# Altium PCB Control.PcbDoc
Units mm, origin at the board's own origin, x right, y up, seen from the top; angles counter-clockwise.
Board outline 90.91 x 58.67 mm, 2 copper layers (Top Layer, Bottom Layer); 26 components, 31 nets, 106 pads, 38 vias.
Unrouted connection lines stored in the file: 1.
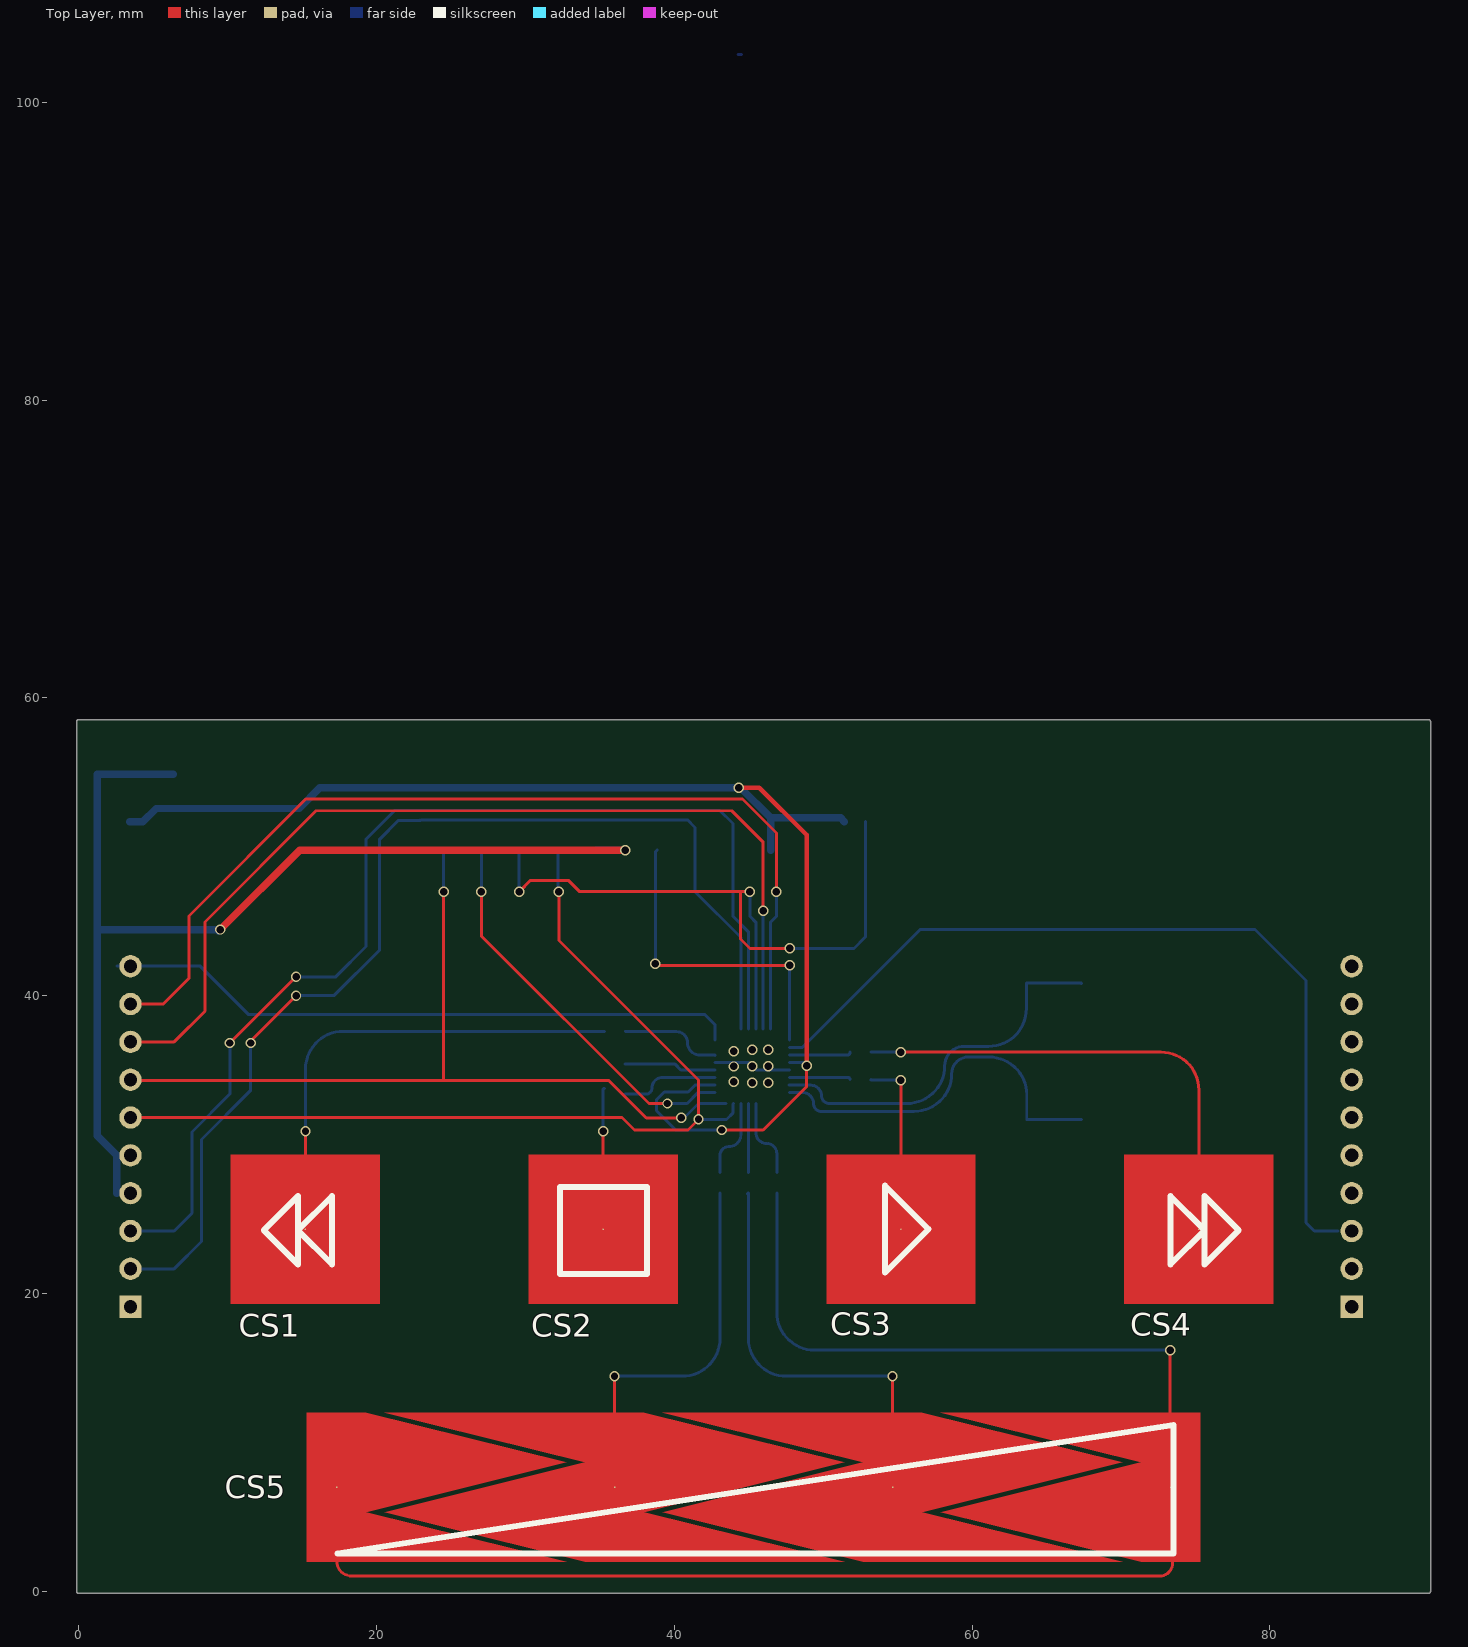
[diagram p0: Top Layer view]
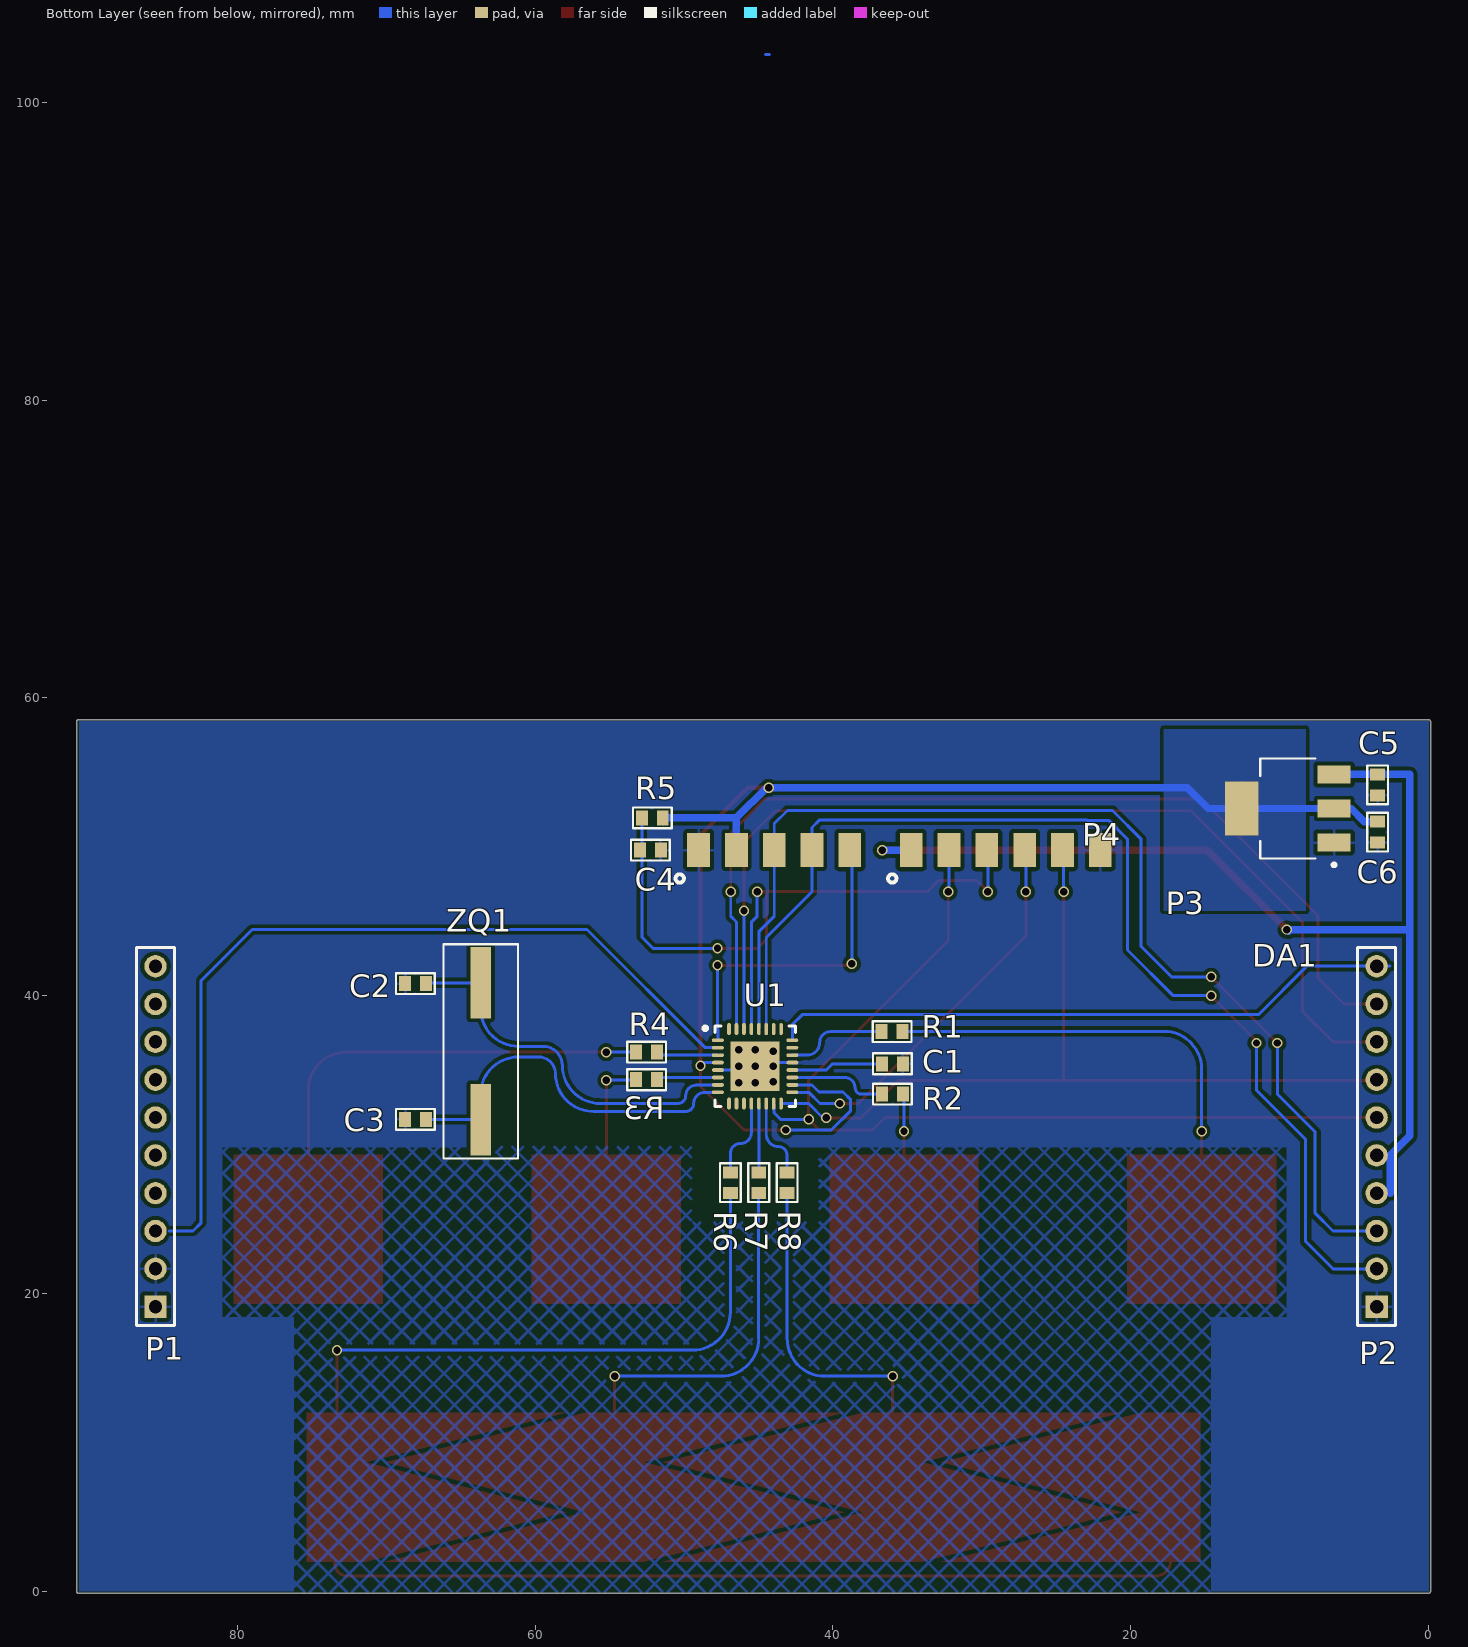
[diagram p1: Bottom Layer view, seen from below]
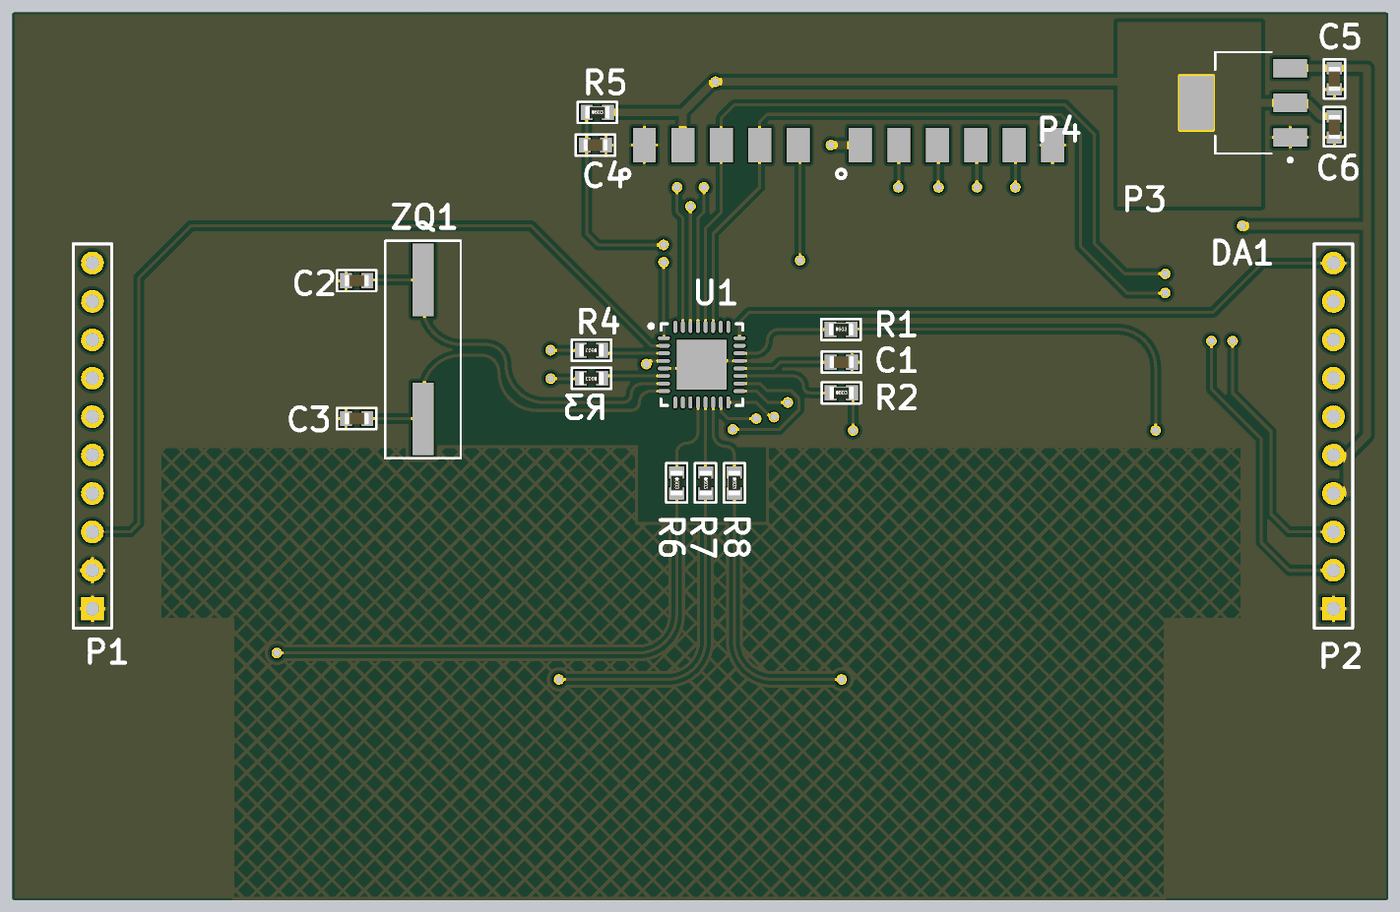
[diagram p2: 3D render of the assembled board from below, using the file's embedded part models]

## Layer stack, top to bottom
Top Solder: solder mask 0.0102, Solder Resist, Dk 3.5
Top Layer: signal copper 0.0356
Dielectric 1: dielectric 0.32, FR-4, Dk 4.8
Bottom Layer: signal copper 0.0356
Bottom Solder: solder mask 0.0102, Solder Resist, Dk 3.5

## Board outline
-0.127,0 ccw(c0,0) 0,-0.127 90.66,-0.127 ccw(c90.66,0) 90.787,0 90.787,58.42 ccw(c90.66,58.42) 90.644,58.546 ccw(c90.627,58.42) 90.627,58.547 0,58.547 ccw(c0,58.42) -0.127,58.42

## Design rules (kind name [scope] priority, off if disabled: settings)
Clearance Vcc [InNamedPolygon('Vcc')] p1: gap=0.254 ignorepadtopadclearanceinfootprint=FALSE except(0: Arc-Hole Track-Hole SMDPad-Fill SMDPad-Poly SMDPad-Region SMDPad-Hole THPad-Hole Via-Hole Fill-Hole Poly-Hole Region-Hole Text-Hole)
Clearance [All] p2: gap=0.254 ignorepadtopadclearanceinfootprint=TRUE except(0: Arc-Hole Track-Hole SMDPad-Hole THPad-Hole Via-Hole Fill-Hole Poly-Hole Region-Hole Text-Hole)
PlaneClearance [All] p1: clearance=0.3
PolygonConnect PolygonConnect_1 [All vs IsNamedPolygon('Vcc')] p1: thpad.connectstyle=Relief thpad.reliefconductorwidth=0.254 thpad.reliefentries=4 thpad.polygonreliefangle="90 Angle" thpad.airgapwidth=0.254 smdpad.connectstyle=Relief smdpad.reliefconductorwidth=0.254 smdpad.reliefentries=4 smdpad.polygonreliefangle="90 Angle" smdpad.airgapwidth=0 via.connectstyle=Relief via.reliefconductorwidth=0.254 via.reliefentries=4 via.polygonreliefangle="90 Angle" via.airgapwidth=0.254
PolygonConnect [All] p2: connectstyle=Relief reliefconductorwidth=0.2 reliefentries=4 polygonreliefangle="90 Angle" airgapwidth=0.254
RoomDefinition Control [InComponentClass('Control')] p1: confinementstyle=ConfineOut formatcopy=TRUE lockcomponents=FALSE outline 0.076,-13.005 16.332,-13.005 16.332,-3.937 0.076,-3.937
RoutingVias [All] p1: holewidth=0.711 width=1.27 viastyle="Through Hole" minholewidth=0.5 minwidth=0.7 maxholewidth=0.7 maxwidth=0.9
SolderMaskExpansion [All] p1: expansion=0.102
Width [All] p1: maxlimit=0.5 minlimit=0.2 preferedwidth=0.3
29 further rules are at their usual default settings.

## Components (designator, comment, footprint, x,y, rotation, side; value= is the part's Value field where it differs from the comment)
C1 "100nF" SM/C_0603 36.706,35.433 r180 bottom
C2 "22pnF" SM/C_0603 68.735,40.818 r180 bottom
C3 "22pF" SM/C_0603 68.735,31.699 r180 bottom
C4 "100nF" SM/C_0603 52.959,49.784 r180 bottom
C5 "100nF" SM/C_0603 3.429,54.864 r270 bottom
C6 "100nF" SM/C_0603 3.429,51.692 r270 bottom
CS1 "Prev Button" ?#1 15.229,24.314 r0 top
CS2 "Stop Button" ?#1 35.229,24.314 r0 top
CS3 "Play Button" ?#1 55.229,24.314 r0 top
CS4 "Next Button" ?#1 75.229,24.314 r0 top
CS5 "Volume Slider" ?#2 45.333,7 r180 top
DA1 "IRU1117-3.3" SOT223 6.35,50.292 r90 bottom
P1 "Header 10" HDR1X10 85.491,19.126 r90 bottom
P2 "Header 10" HDR1X10 3.491,19.126 r90 bottom
P3 "Header 6H" "Header 6 SMD" 34.747,49.784 r180 bottom
P4 "Header 5H" "Header 5 SMD" 49.022,49.784 r180 bottom
R1 "0" SM/R_0603 36.728,37.592 r180 bottom
R2 "0" SM/R_0603 36.703,33.401 r180 bottom
R3 "0" SM/R_0603 51.816,34.366 r0 bottom
R4 "0" SM/R_0603 51.816,36.22 r0 bottom
R5 "10k" SM/R_0603 52.832,51.943 r180 bottom
R6 "0" SM/R_0603 46.888,28.146 r270 bottom
R7 "0" SM/R_0603 44.983,28.146 r270 bottom
R8 "0" SM/R_0603 43.078,28.146 r270 bottom
U1 "ATmega328PB-MN" 32M1-A_N 45.229,35.266 r180 bottom locked
ZQ1 "HC-49SM" HC-49SM 63.652,31.677 r90 bottom

## Footprints (in the part's own frame and the unit in brackets; to place one, negate y for a bottom-side part, rotate by r counter-clockwise, add the part's x,y. Pads: shape width x height; smd on the part's side, far side on the other; paste and mask are expansions set on the pad)
32M1-A_N [mm] "QFN, 32-Leads, Body 5x5mm, Pitch 0.5mm, Thermal Pad 3.3x3.3mm, IPC Medium Density"
  oval 0.8x0.25 smd: 1(-2.5,1.75) 2(-2.5,1.25) 3(-2.5,0.75) 4(-2.5,0.25) 5(-2.5,-0.25) 6(-2.5,-0.75) 7(-2.5,-1.25) 8(-2.5,-1.75) 17(2.5,-1.75) 18(2.5,-1.25) 19(2.5,-0.75) 20(2.5,-0.25) 21(2.5,0.25) 22(2.5,0.75) 23(2.5,1.25) 24(2.5,1.75)
  oval 0.25x0.8 smd: 9(-1.75,-2.5) 10(-1.25,-2.5) 11(-0.75,-2.5) 12(-0.25,-2.5) 13(0.25,-2.5) 14(0.75,-2.5) 15(1.25,-2.5) 16(1.75,-2.5) 25(1.75,2.5) 26(1.25,2.5) 27(0.75,2.5) 28(0.25,2.5) 29(-0.25,2.5) 30(-0.75,2.5) 31(-1.25,2.5) 32(-1.75,2.5)
  rect 3.3x3.3 smd: 33(0,0)
  silkscreen extent -3.48,-2.7 2.7,2.7, body extent -2.55,-2.55 2.55,2.55, height 1
HC-49SM [mm]
  rect 4.8x1.4 smd: 1(0,0) 2(9.191,0)
  silkscreen extent -2.6,-2.5 11.79,2.5
HDR1X10 [mm] "Connector; Header; 10 Position"
  rect 1.5x1.5 hole 0.9: 1(0,0)
  round 1.5 hole 0.9: 2(2.54,0) 3(5.08,0) 4(7.62,0) 5(10.16,0) 6(12.7,0) 7(15.24,0) 8(17.78,0) 9(20.32,0) 10(22.86,0)
  silkscreen extent -1.27,-1.27 24.13,1.27
"Header 5 SMD" [mm]
  rect 1.524x2.29 smd: 1(0,0) 2(2.54,0) 3(5.08,0) 4(7.62,0) 5(10.16,0)
  silkscreen extent -1.55,-2.19 -0.99,-1.62
"Header 6 SMD" [mm]
  rect 1.524x2.29 smd: 1(0,0) 2(2.54,0) 3(5.08,0) 4(7.62,0) 5(10.16,0) 6(12.7,0)
  silkscreen extent -1.55,-2.19 -0.99,-1.62
SM/C_0603 [mm]
  rect 0.8x1 smd: 1(0,0) 2(1.4,0)
  silkscreen extent -0.6,-0.7 2,0.7, body extent -0.09,-0.4 1.51,0.4, height 0.6
SM/R_0603 [mm]
  rect 0.8x1 smd: 1(0,0) 2(1.4,0)
  silkscreen extent -0.6,-0.7 2,0.7, body extent -0.09,-0.41 1.51,0.41, height 0.45
SOT223 [mil]
  rect 48x88 smd: 1(0,0) 2(90,0) 3(180,0)
  rect 142x88 smd: 4(90,244)
  silkscreen extent -63,-4 222,195
?#1 [mm]
  round 0.1 smd paste-0.05: 1(0,0)
  Top Layer region: -5,-5 -5,5 5,5 5,-5 -5,-5
?#2 [mm]
  round 0.1 smd paste-0.05: 1(-28,0) 1(28,0) 2(-9.333,0) 3(9.333,0)
  Top Layer region: -30,5 -26,5 -12.578,1.667 -26,-1.667 -12.578,-5 -30,-5 -30,5
  Top Layer region: -24.755,5 -7.333,5 6.089,1.667 -7.333,-1.667 6.089,-5 -11.333,-5 -24.755,-1.667 -11.333,1.667 -24.755,5 -24.755,5
  Top Layer region: -6.089,5 11.333,5 24.755,1.667 11.333,-1.667 24.755,-5 7.333,-5 -6.089,-1.667 7.333,1.667 -6.089,5 -6.089,5
  Top Layer region: 12.578,5 30,5 30,-5 26,-5 12.578,-1.667 26,1.667 12.578,5 12.578,5

## Part data
C1 C2 C3 C4 C5 C6: library part C_0603, Manufacturer=AVX, Package=0603, Tolerance=±20%, Voltage=50V, TCC=±15%, Type=X7R
CS1 CS2 CS3 CS4: library part QTouchButton, "QTouch Button", ConfigurationParameters==__sensorid[1]=width[15]=height[15]=, ConfiguratorName=ATMEL_TOUCH
CS5: library part MediumQTouchSlider, "Medium QTouch Slider", ConfigurationParameters==__sensorid[4]=width[50]=height[12]=gapthickness[0.3]=, ConfiguratorName=ATMEL_TOUCH
DA1: library part IRU1117, Package=SOT-223, Òèï=IRU1117-18CY
P1 P2: "Header, 10-Pin", LatestRevisionDate=17-Jul-2002, LatestRevisionNote="Re-released for DXP Platform.", Publisher="Altium Limited"
P3 P4: "Header, 5-Pin, Right Angle", LatestRevisionDate=17-Jul-2002, LatestRevisionNote="Re-released for DXP Platform.", Publisher="Altium Limited"
R1 R2 R3 R4 R5 R6 R7 R8: library part R_0603, Manufacturer=YAGEO, Package=0603, Power=1/10W, Tolerance=±5%, TCR=±100ppm/°C, Type=RC
U1: library part ATmega328P-MN, "8-bit AVR Microcontroller, 32KB Flash, 1KB EEPROM, 2KB SRAM, 32-pin MLF, Industrial Grade (-40°C to 105°C)", Code_JEDEC=MO-220-VHHD-2, ComponentLink1Description="Manufacturer URL", ComponentLink1URL=http://www.atmel.com/, ComponentLink2Description="ATmega48A/48PA/88A/88PA/168A/168PA/328/328P Datasheet", ComponentLink2URL=http://www.atmel.com/dyn/resources/prod_documents/8271.pdf, ComponentLink3Description="ATmega48A/48PA/88A/88PA/168A/168PA/328/328P Summary", ComponentLink3URL=http://www.atmel.com/dyn/resources/prod_documents/8271S.pdf, DatasheetVersion="revD, May-2011", PackageDescription="32-Pin Micro Lead Frame Package (MLF),  5 x 5 x 1.0 mm Body, Pitch 0.50 mm, 3.10mm Exposed Pad", PackageReference=32M1-A, PackageVersion="revE, May-2006"
ZQ1: Ïðèì=Hosonic, Òèï=HC-49SM-11.0592

## Via types
v1: diameter 0.7, hole 0.5, Top Layer to Bottom Layer, 38 vias

## Nets (pads, with @x,y where several pads share a name; then routed paths per layer and width w, separated by ;. In a path a pad name is that pad's centre, name@x,y a point inside that pad or via, vN(x,y) a via of type N, cw(c..) or ccw(c..) an arc to the next point about the centre after c; other vN are vias at no path point)
GND: C1.2 C2.1 C3.1 C4.2 C5.2 C6.2 DA1.1 P1.1 P1.2 P2.1 P3.6 P4.1 U1.5 U1.21 U1.33 | length 5.2
  Bottom Layer w0.2: U1.21 44.979,35.516 v1(45.229,35.266) 45.479,35.016 U1.5
  other v1: 45.229,34.166 46.329,34.166 43.999,34.238 43.999,35.254 46.329,35.266 43.999,36.27 45.229,36.366 46.329,36.366
I2C_CLK: P2.3 P4.3 U1.28 | length 76.2
  Top Layer w0.2: v1(10.16,36.83) v1(14.605,41.275)
  Bottom Layer w0.2: P2.3 6.426,24.206 7.62,25.4 7.62,30.861 10.16,33.401 v1(10.16,36.83) ; v1(14.605,41.275) 17.272,41.275 19.304,43.307 19.304,50.521 21.234,52.451 43.053,52.451 43.942,51.562 P4.3 43.942,45.339 44.979,44.302 U1.28
I2C_SDA: P2.2 P4.4 U1.27 | length 75.7
  Top Layer w0.2: v1(11.557,36.83) 11.557,36.957 v1(14.605,40.005)
  Bottom Layer w0.2: P2.2 6.426,21.666 8.255,23.495 8.255,30.353 11.557,33.655 v1(11.557,36.83) ; v1(14.605,40.005) 17.145,40.005 20.218,43.078 20.218,50.521 21.483,51.785 22.956,51.785 22.987,51.816 40.894,51.816 41.402,51.308 P4.4 41.402,46.99 44.479,43.913 U1.27
NetC1_1: C1.1 U1.20 | length 6.2
  Bottom Layer w0.2: C1.1 40.03,35.433 40.447,35.016 U1.20
NetCS1_1: CS1.1 R1.2 | length 32.4
  Top Layer w0.2: 15.138,21.356 ccw(c15.229,21.356) 15.229,21.266 ; CS1.1 15.24,24.314 v1(15.24,30.912)
  Bottom Layer w0.2: v1(15.24,30.912) 15.24,35.077 cw(c17.78,35.077) 17.78,37.617 R1.2@35.306,37.617
NetCS2_1: CS2.1 R2.2 | length 9.6
  Top Layer w0.2: 35.229,21.266 35.255,21.293 ; CS2.1@35.23,24.314 v1(35.23,30.912)
  Bottom Layer w0.2: v1(35.23,30.912) 35.23,33.706 cw(c35.306,33.706) R2.2@35.306,33.782
NetCS3_1: CS3.1 R3.2 | length 12.1
  Top Layer w0.2: 55.194,21.301 55.229,21.266 ; v1(55.22,34.341) 55.22,24.314 CS3.1
  Bottom Layer w0.2: R3.2 ccw(c53.241,34.366) 53.241,34.341 v1(55.22,34.341) ccw(c55.194,34.341) v1@55.194,34.366
NetCS4_1: CS4.1 R4.2 | length 32.9
  Top Layer w0.2: v1(55.22,36.22) 72.689,36.22 cw(c72.689,33.68) 75.229,33.68 CS4.1 ; 75.229,21.266 ccw(c75.229,21.323) 75.286,21.323
  Bottom Layer w0.2: R4.2 v1(55.22,36.22)
NetCS5_1: CS5.1 R6.2 | length 112.6
  Top Layer w0.2: CS5.1@17.333,7 17.333,2.047 ccw(c18.339,2.047) 18.339,1.041 72.619,1.041 ccw(c72.619,1.88) 73.457,1.88 73.457,6.877 ; v1(73.304,16.205) 73.304,7.029 ccw(c73.457,7.029) 73.457,6.877 ; CS5.1@73.333,7 cw(c73.333,6.877) 73.457,6.877
  Bottom Layer w0.2: R6.2 46.888,18.745 ccw(c49.428,18.745) 49.428,16.205 v1(73.304,16.205)
NetCS5_2: CS5.2 R7.2 | length 32.8
  Top Layer w0.2: v1(54.661,14.453) 54.661,7 CS5.2 54.667,11.43
  Bottom Layer w0.2: R7.2@44.933,26.695 cw(c44.983,26.695) R7.2 44.983,16.993 ccw(c47.523,16.993) 47.523,14.453 v1(54.661,14.453)
NetCS5_3: CS5.3 R8.2 | length 30.2
  Top Layer w0.2: v1(35.992,14.453) 35.992,7 CS5.3 36,11.43
  Bottom Layer w0.2: v1(35.992,14.453) 40.538,14.453 ccw(c40.538,16.993) 43.078,16.993 R8.2
"Next button": R4.1 U1.3 | length 4.2
  Bottom Layer w0.2: U1.3 51.612,36.016 ccw(c51.612,36.22) R4.1
nRESET: C4.1 P3.3 R5.1 U1.29 | length 48.2
  Top Layer w0.2: v1(29.591,46.99) 30.353,47.752 32.893,47.752 33.655,46.99 44.45,46.99 ; v1(45.085,46.99) 44.45,46.99 ; v1(47.752,43.18) 45.085,43.18 44.45,43.815 44.45,46.99
  Bottom Layer w0.2: v1(29.591,46.99) 29.591,49.708 P3.3 ; v1(45.085,46.99) 45.085,45.339 45.479,44.945 U1.29 ; v1(47.752,43.18) 52.07,43.18 52.835,43.945 52.835,51.686 R5.1@52.832,51.689
"P/S button": P1.3 U1.2 | length 58
  Bottom Layer w0.2: U1.2 48.581,36.516 56.515,44.45 78.994,44.45 82.423,41.021 82.423,24.765 82.982,24.206 84.577,24.206
"Play button": R3.1 U1.6 | length 4.2
  Bottom Layer w0.2: U1.6 51.666,34.516 cw(c51.666,34.366) R3.1
"Prev button": R1.1 U1.22 | length 6.9
  Bottom Layer w0.2: R1.1 40.157,37.592 cw(c40.157,36.855) 40.894,36.855 ccw(c41.733,36.855) 41.733,36.016 U1.22
RxD_0: P2.8 U1.30 | length 65.8
  Top Layer w0.2: P2.8 6.426,36.906 8.484,38.964 8.484,44.958 15.951,52.426 43.866,52.426 45.974,50.317 v1(45.974,45.72)
  Bottom Layer w0.2: v1(45.974,45.72) 45.979,45.715 U1.30
RxD_1(MISO): P2.7 P3.5 U1.16 | length 56.9
  Top Layer w0.2: P2.7 3.542,34.315 24.511,34.315 ; v1(24.511,46.99) 24.511,34.315 ; v1(40.462,31.801) 38.125,31.801 35.611,34.315 24.511,34.315
  Bottom Layer w0.2: v1(24.511,46.99) 24.511,49.708 P3.5 ; v1(40.462,31.801) 40.665,31.801 41.631,32.766 U1.16
SCK0: P3.4 U1.17 | length 26.4
  Top Layer w0.2: v1(27.051,46.99) 27.051,44.018 38.303,32.766 v1(39.548,32.766)
  Bottom Layer w0.2: v1(27.051,46.99) 27.051,49.708 P3.4 ; v1(39.548,32.766) 40.869,32.766 41.619,33.516 U1.17
SQW: P4.5 U1.1 | length 21.8
  Top Layer w0.2: v1(38.735,42.164) 38.862,42.037 v1(47.752,42.037)
  Bottom Layer w0.2: v1(38.735,42.164) 38.735,49.657 P4.5 ; U1.1 47.729,37.687 47.752,37.71 v1(47.752,42.037)
"Stop button": R2.1 U1.19 | length 6.7
  Bottom Layer w0.2: R2.1 38.1,33.401 ccw(c38.1,33.807) 38.506,33.807 cw(c39.215,33.807) 39.215,34.516 U1.19
TxD_0: P2.9 U1.31 | length 65.8
  Top Layer w0.2: P2.9 5.69,39.446 7.417,41.173 7.417,45.364 15.265,53.213 44.584,53.213 46.863,50.934 v1(46.863,46.99)
  Bottom Layer w0.2: U1.31 46.479,44.955 46.863,45.339 v1(46.863,46.99)
TxD_1(MOSI): P2.6 P3.2 U1.15 | length 63.9
  Top Layer w0.2: P2.6 36.5,31.826 37.338,30.988 40.919,30.988 v1(41.631,31.699) 41.631,34.341 32.258,43.713 v1(32.258,46.99)
  Bottom Layer w0.2: P3.2 32.207,47.041 v1(32.258,46.99) ; v1(41.631,31.699) 43.505,31.699 43.958,32.152 43.958,32.745 U1.15
VCC: C6.1 DA1.2 DA1.4 P4.2 R5.2 U1.4 U1.18 | length 93
  Top Layer w0.2: v1(43.18,30.988) 45.974,30.988 48.895,33.909 v1(48.895,35.306)
  Top Layer w0.3: v1(44.323,53.975) 45.72,53.975 48.895,50.8 v1(48.895,35.306)
  Bottom Layer w0.2: U1.18 41.408,34.016 40.938,33.547 39.333,33.547 38.811,33.025 38.811,32.283 40.107,30.988 v1(43.18,30.988) ; U1.4 48.685,35.516 v1(48.895,35.306)
  Bottom Layer w0.3: v1(44.323,53.975) v1@44.45,53.975
  Bottom Layer w0.5: C6.1 4.321,51.692 5.207,52.578 DA1.2 DA1.4 14.808,52.578 16.205,53.975 v1(44.323,53.975) ; v1@44.45,53.975 46.482,51.943 ; P4.2 46.482,51.943 ; R5.2@51.432,51.689 51.178,51.943 46.482,51.943
Vcc_CTRL: P2.10 U1.24 | length 42.8
  Bottom Layer w0.2: 2.577,41.986 P2.10 8.179,41.986 11.43,38.735 42.062,38.735 42.729,38.069 U1.24
Vcc_USB: C5.1 DA1.3 P2.4 P2.5 P3.1 | length 73.5
  Top Layer w0.5: v1(9.525,44.45) 14.859,49.784 v1(36.703,49.784)
  Bottom Layer w0.2: 1.27,44.475 1.295,44.45
  Bottom Layer w0.5: 1.295,44.45 v1(9.525,44.45) v1@9.398,44.323 ; 2.577,26.746 2.577,29.286 1.27,30.593 1.27,44.475 1.27,54.864 C5.1 DA1.3 ; P3.1 v1(36.703,49.784)
VolSl_1: R6.1 U1.12 | length 5.4
  Bottom Layer w0.2: U1.12 45.479,30.823 ccw(c46.228,30.823) 46.228,30.074 cw(c46.228,29.413) 46.888,29.413 R6.1
VolSl_2: R7.1 U1.13 | length 4.6
  Bottom Layer w0.2: U1.13 44.979,28.151 R7.1
VolSl_3: R8.1 U1.14 | length 5.4
  Bottom Layer w0.2: R8.1 43.078,29.286 cw(c43.663,29.286) 43.663,29.87 ccw(c43.663,30.686) 44.479,30.686 U1.14
XTAL1: C2.2 U1.7 ZQ1.2 | length 25.8
  Bottom Layer w0.2: U1.7 cw(c47.708,34.016) 47.708,33.995 49.19,33.995 cw(c49.19,33.299) 49.886,33.299 ccw(c50.419,33.299) 50.419,32.766 55.626,32.766 ccw(c55.626,35.306) 58.166,35.306 cw(c59.461,35.306) 59.461,36.601 61.112,36.601 ccw(c61.112,39.141) 63.652,39.141 ZQ1.2 67.285,40.869 cw(c67.285,40.818) C2.2
XTAL2: C3.2 U1.8 ZQ1.1 | length 25.5
  Bottom Layer w0.2: U1.8 48.602,33.516 cw(c48.602,32.766) 49.352,32.766 ccw(c49.886,32.766) 49.886,32.233 56.094,32.233 ccw(c56.094,34.773) 58.634,34.773 cw(c59.752,34.773) 59.752,35.89 61.134,35.89 cw(c61.134,33.35) 63.674,33.35 63.674,31.699 C3.2
pads on no net: P1.4 P1.5 P1.6 P1.7 P1.8 P1.9 P1.10 U1.9 U1.10 U1.11 U1.23 U1.25 U1.26 U1.32
copper on no net: | length 0.3
  Bottom Layer w0.2: 36.728,37.592 cw(c36.754,37.592) 36.754,37.617 ; 42.729,36.016 42.729,36.015 ccw(c42.748,36.015) 42.748,35.995 ; 44.272,103.2 44.526,103.2

## Polygon pours and split planes (outlines as drawn)
GND on Bottom Layer "GND" (solid, remove dead copper, pour order 8): 0,0 14.605,0 14.605,18.415 9.525,18.415 9.525,29.845 40.894,29.845 40.919,29.82 81.001,29.82 81.026,29.845 81.026,18.415 76.2,18.415 76.2,0 90.627,0 90.627,58.42 0,58.42
GND on Bottom Layer "GND" (hatched 45Degree grid 1 track 0.2, pour order 2): 9.525,29.845 9.525,18.415 14.605,18.415 14.605,0 76.2,0 76.2,18.415 81.026,18.415 81.026,29.845 49.53,29.845 49.53,24.765 40.894,24.765 40.894,29.845
VCC on Bottom Layer "Vcc" (solid, pour order 6): 8.255,57.912 17.78,57.912 17.78,45.72 8.255,45.72

## Silkscreen, mask and mechanical layers (free items; w line width, h text height)
Top Overlay:
  lines w0.4: 12.446,24.257 14.732,21.971 14.732,26.543 12.446,24.257 ; 14.732,24.257 17.018,26.543 17.018,21.971 14.732,24.257 ; 17.399,2.54 73.533,11.176 73.533,2.54 17.399,2.54 ; 32.334,21.311 38.176,21.311 38.176,27.153 32.334,27.153 32.334,21.311 ; 54.153,21.412 54.153,27.254 57.074,24.333 54.153,21.412 ; 73.33,21.971 73.33,26.543 75.616,24.257 73.33,21.971 ; 75.616,21.971 77.902,24.257 75.616,26.543 75.616,21.971
Mechanical 1:
  lines w0.254: 90.627,58.42 0,58.42 0,0 90.66,0 90.66,58.42

## Dimensions
3.491,41.986 to 85.491,41.986 on Mechanical 1
90.66,0 to 90.627,58.42 on Mechanical 1
0,58.42 to 90.627,58.42 on Mechanical 1